# Altium PCB 探听器.PcbDoc
Units mil, origin at the board's own origin, x right, y up, seen from the top; angles counter-clockwise.
Board outline 5118.11 x 1968.5 mil, 2 copper layers (Top Layer, Bottom Layer); 17 components, 11 nets, 46 pads, 0 vias.
Unrouted connection lines stored in the file: 9.
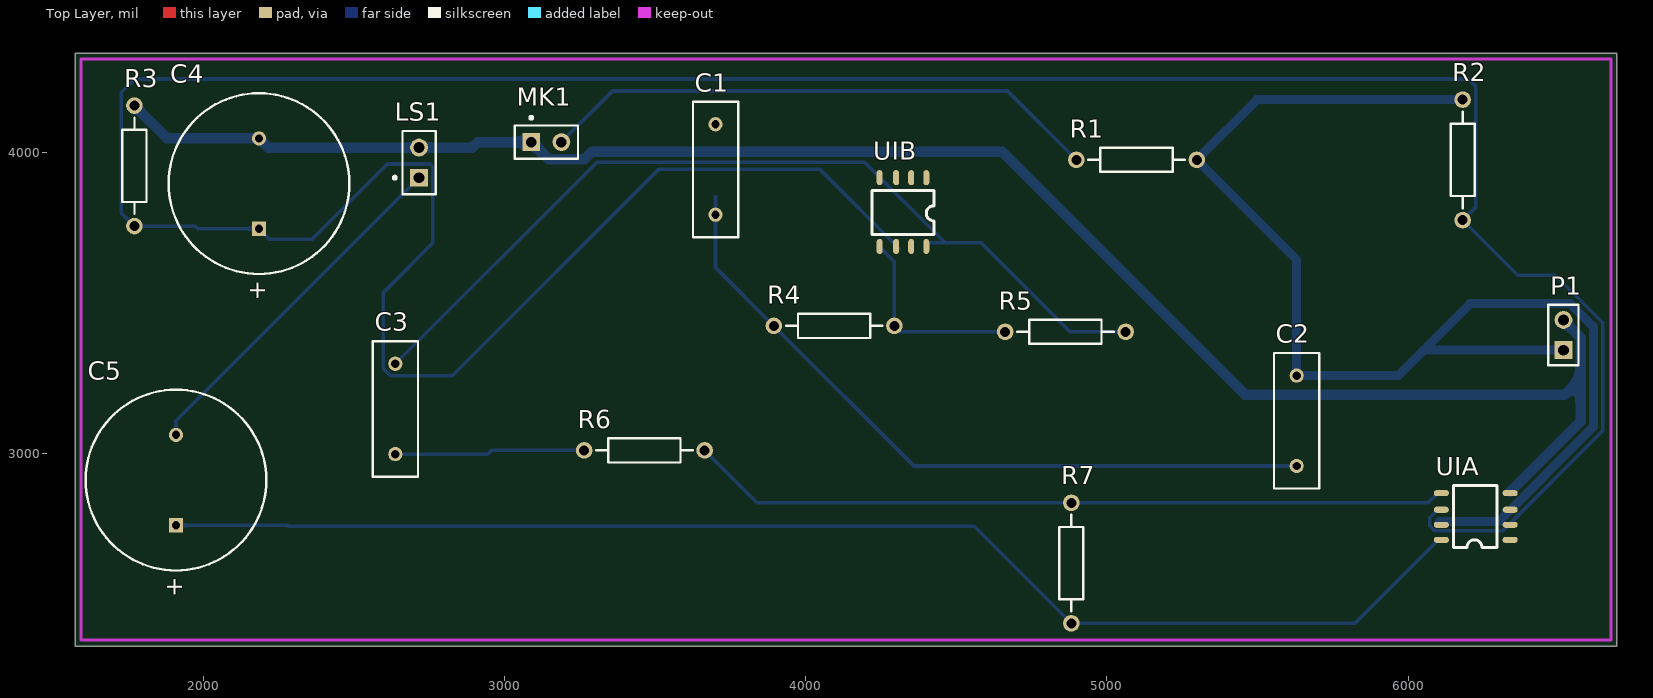
[diagram p0: Top Layer view]
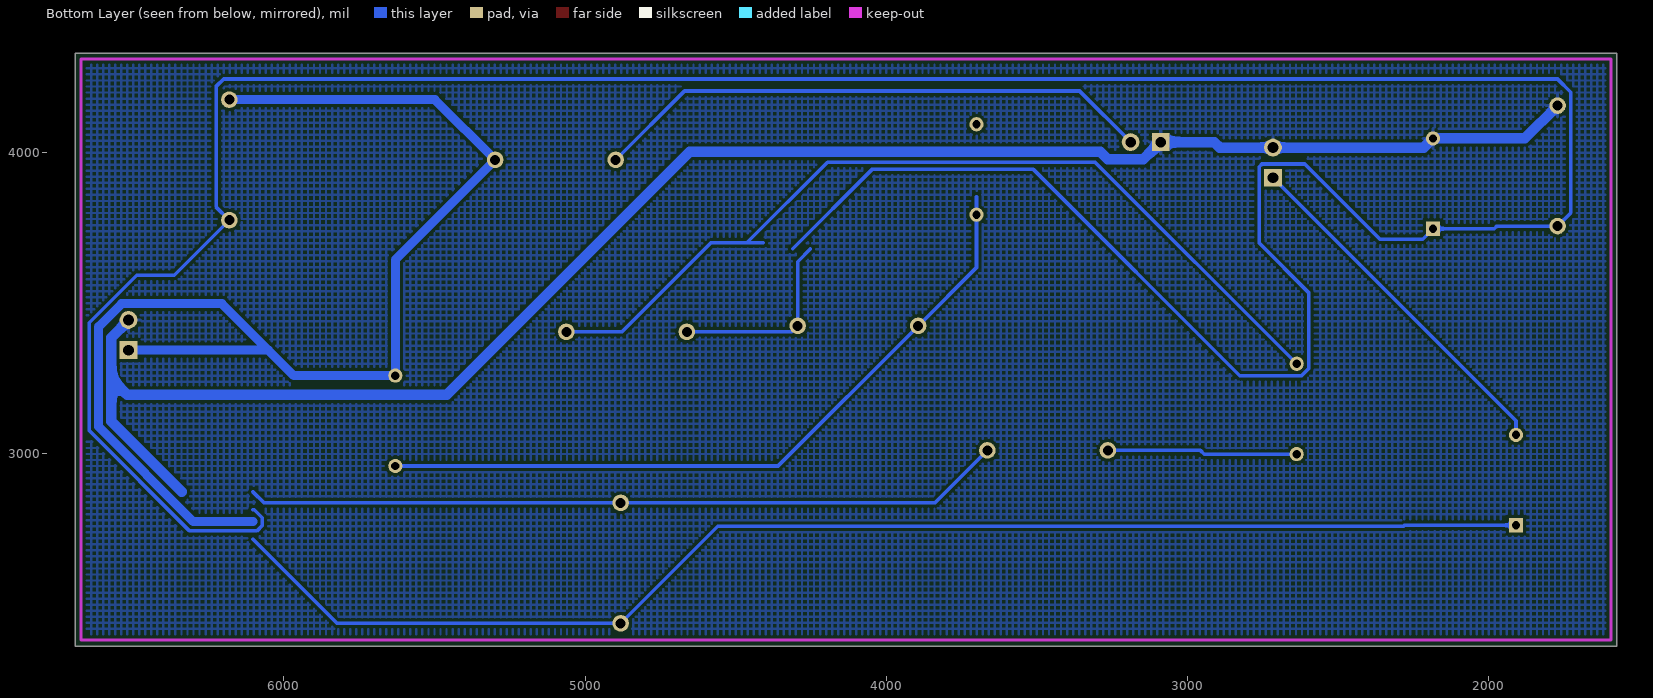
[diagram p1: Bottom Layer view, seen from below]

## Layer stack, top to bottom
Top Solder: solder mask 0.4, Solder Resist, Dk 3.5
Top Layer: signal copper 1.4
Dielectric 1: dielectric 12.6, FR-4, Dk 4.8
Bottom Layer: signal copper 1.4
Bottom Solder: solder mask 0.4, Solder Resist, Dk 3.5

## Board outline
1574.8,2362.2 6692.91,2362.2 6692.91,4330.71 1574.8,4330.71

## Design rules (kind name [scope] priority, off if disabled: settings)
Clearance [All] p1: gap=10 ignorepadtopadclearanceinfootprint=FALSE except(0: Arc-Hole Track-Hole SMDPad-Hole THPad-Hole Via-Hole Fill-Hole Poly-Hole Region-Hole Text-Hole)
PolygonConnect [All] p1: connectstyle=Relief reliefconductorwidth=10 reliefentries=4 polygonreliefangle="90 Angle" airgapwidth=10
RoutingLayers [All] p1: top layer_v5=FALSE bottom layer_v5=TRUE
RoutingVias [All] p1: holewidth=28 width=50 viastyle="Through Hole" minholewidth=28 minwidth=50 maxholewidth=28 maxwidth=50
SolderMaskExpansion [All] p1: expansion=4 istentingtop=FALSE
Width Width_2 [InNet('GND')] p1: maxlimit=35 minlimit=35 preferedwidth=35
Width Width_1 [InNet('VCC')] p2: maxlimit=30 minlimit=30 preferedwidth=30
Width [All] p3: maxlimit=12 minlimit=12 preferedwidth=12
29 further rules are at their usual default settings.

## Components (designator, comment, footprint, x,y, rotation, side; value= is the part's Value field where it differs from the comment)
C1 "104" RAD-0.3 3700.79,3944.49 r270 top value=100pF
C2 "103" RAD-0.3 5629.92,3110.24 r90 top value=100pF
C3 "103" RAD-0.3 2637.8,3149.61 r270 top value=100pF
C4 "Cap Pol1" RB7.6-15 2185.04,3897.64 r270 top value=10u
C5 "Cap Pol1" RB7.6-15 1909.45,2913.39 r270 top value=220u
LS1 "Speaker" PIN2 2716.54,3917.32 r90 top
MK1 "Mic2" PIN2 3088.98,4035.43 r0 top
P1 "Header 2" HDR1X2 6515.75,3344.88 r90 top
R1 "Res2" AXIAL-0.4 5098.43,3976.38 r0 top value=20K
R2 "Res2" AXIAL-0.4 6181.1,3976.38 r90 top value=20K
R3 "Res2" AXIAL-0.4 1771.65,3956.69 r90 top value=10K
R4 "Res2" AXIAL-0.4 4094.49,3425.2 r180 top value=1K
R5 "Res2" AXIAL-0.4 4862.2,3405.51 r180 top value=1M
R6 "1K" AXIAL-0.4 3464.57,3011.81 r0 top
R7 "Res2" AXIAL-0.4 4881.89,2637.8 r270 top value=1M
UIA "双运算放大器" LM358 6110.24,2714.96 r90 top
UIB "双运算放大器" LM358 4400.39,3688.98 r180 top

## Footprints (in the part's own frame and the unit in brackets; to place one, negate y for a bottom-side part, rotate by r counter-clockwise, add the part's x,y. Pads: shape width x height; smd on the part's side, far side on the other; paste and mask are expansions set on the pad)
AXIAL-0.4 [mm] "Axial Device, Thru-Hole; 2 Leads; 0.4 in Pin Spacing"
  round 1.4 hole 0.85: 1(-5.08,0) 2(5.08,0)
  silkscreen extent -4.06,-1.02 4.06,1.02
HDR1X2 [mm] "Connector; Header; 2 Position"
  rect 1.5x1.5 hole 0.9: 1(0,0)
  round 1.5 hole 0.9: 2(2.54,0)
  silkscreen extent -1.27,-1.27 3.81,1.27
LM358 [mm]
  oval 0.51x1.27 smd: 1(0,0) 2(1.27,0) 3(2.54,0) 4(3.937,0) 5(3.937,-5.8) 6(2.54,-5.8) 7(1.27,-5.8) 8(0,-5.8)
  silkscreen extent -0.64,-4.7 4.57,-1.02
PIN2 [mm] "Photosensitive Diode; 2 Leads"
  rect 1.5x1.5 hole 0.9: 1(0,0)
  round 1.5 hole 0.9: 2(2.54,0)
  silkscreen extent -1.4,-1.4 3.94,2.17
RAD-0.3 [mm] "Radial Cap, Thru-Hole; 2 Leads; 0.3 in Pin Spacing"
  round 1.2 hole 0.7: 1(-3.81,0) 2(3.81,0)
  silkscreen extent -5.71,-1.91 5.72,1.9
RB7.6-15 [mm] "Polarized Capacitor (Radial); 2 Leads"
  rect 1.2x1.2 hole 0.7: 1(3.81,0)
  round 1.2 hole 0.7: 2(-3.81,0)
  silkscreen extent -7.62,-7.62 7.62,7.62

## Part data
C1 C2 C3: library part Cap, "Capacitor", LatestRevisionDate=17-Jul-2002, LatestRevisionNote="Re-released for DXP Platform.", PackageDescription="Radial Cap, Thru-Hole; 2 Leads; 0.3 in Pin Spacing", PackageReference=RAD-0.3, Published=8-Jun-2000, Publisher="Altium Limited"
C4 C5: "Polarized Capacitor (Radial)", LatestRevisionDate=17-Jul-2002, LatestRevisionNote="Re-released for DXP Platform.", PackageDescription="Polarized Capacitor (Radial); 2 Leads", PackageReference=RB7.6-15, Published=8-Jun-2000, Publisher="Altium Limited"
LS1: "Loudspeaker", LatestRevisionDate=17-Jul-2002, LatestRevisionNote="Re-released for DXP Platform.", PackageReference=PIN2, Published=24-Mar-1999, Publisher="Altium Limited"
MK1: "Microphone", LatestRevisionDate=17-Jul-2002, LatestRevisionNote="Re-released for DXP Platform.", PackageReference=PIN2, Published=24-Mar-1999, Publisher="Altium Limited"
P1: "Header, 2-Pin", LatestRevisionDate=17-Jul-2002, LatestRevisionNote="Re-released for DXP Platform.", Publisher="Altium Limited"
R1 R2 R3 R4 R5 R7: "Resistor", LatestRevisionDate=17-Jul-2002, LatestRevisionNote="Re-released for DXP Platform.", PackageDescription="Axial Device, Thru-Hole; 2 Leads; 0.4 in Pin Spacing", PackageReference=AXIAL-0.4, Published=8-Jun-2000, Publisher="Altium Limited"
R6: library part Res2, "Resistor", LatestRevisionDate=17-Jul-2002, LatestRevisionNote="Re-released for DXP Platform.", PackageDescription="Axial Device, Thru-Hole; 2 Leads; 0.4 in Pin Spacing", PackageReference=AXIAL-0.4, Published=8-Jun-2000, Publisher="Altium Limited"
UIA UIB: library part 放大器

## Nets (pads, with @x,y where several pads share a name; then routed paths per layer and width w, separated by ;. In a path a pad name is that pad's centre, name@x,y a point inside that pad or via, vN(x,y) a via of type N, cw(c..) or ccw(c..) an arc to the next point about the centre after c; other vN are vias at no path point)
GND: C4.2 LS1.2 MK1.1 P1.2 R3.2 UIA.5 | length 5947.7
  Bottom Layer w35: R3.2 1880.71,4047.64 C4.2 2215.36,4017.32 LS1.2 2893,4017.32 2911.11,4035.43 MK1.1 3146.41,3978 3265,3978 3290,4003 4653,4003 5459,3197 6520,3197 6572.78,3249.78 ; 6338.58,2874.02 6572.78,3108.21 6572.78,3249.78 ; P1.2 6515.75,3442.93 6572.78,3385.91 6572.78,3249.78
NetC1_1: C1.1 MK1.2 R1.1 | length 1874.5
  Bottom Layer w12: MK1.2 3358.66,4205.12 3700.79,4205.12 4669.69,4205.12 R1.1
NetC1_2: C1.2 C2.1 R4.2 | length 2488.2
  Bottom Layer w12: C1.2 3700.79,3846.06 ; 3700.79,3853.54 3700.79,3618.9 R4.2 4359.45,2960.24 C2.1
NetC3_1: C3.1 R5.1 UIB.1 | length 2988.8
  Bottom Layer w12: C3.1 3307.19,3969 4195,3969 4463.21,3700.79 ; 4409.45,3700.79 4463.21,3700.79 ; R5.1 4877.63,3405.51 4582.35,3700.79 4463.21,3700.79
NetC3_2: C3.2 R6.1 | length 631.8
  Bottom Layer w12: C3.2 2945,2999.61 2957.21,3011.81 R6.1
NetC4_1: C4.1 R2.1 R3.1 UIA.3 UIB.3 | length 11171.2
  Bottom Layer w12: 4311.02,3681.1 4047.39,3944.74 3511.67,3944.74 2826.91,3259.98 2621.38,3259.98 2598.17,3283.19 2598.17,3536.39 2762.06,3700.28 2762.06,3953.48 2752.69,3962.85 2611.06,3962.85 2361.26,3713.05 2219.63,3713.05 C4.1 1982.05,3747.64 1973,3756.69 R3.1 1728,3800.35 1728,4201 1772,4245 6200,4245 6225,4220 6225,3820.27 R2.1 6364.16,3593.32 6488.26,3593.32 6646.28,3435.31 6646.28,3077.76 6313.1,2744.59 6089.52,2744.59 6071.36,2762.75 6071.36,2788.43 6097.89,2814.96 6102.36,2814.96
NetC5_1: C5.1 R7.2 UIA.1 | length 4443.2
  Bottom Layer w12: C5.1 2279.61,2763.39 2283,2760 4559.69,2760 R7.2 5823.62,2437.8 6102.36,2716.54
NetC5_2: C5.2 LS1.1 | length 1188.2
  Bottom Layer w12: C5.2 1909.45,3110.24 LS1.1
NetR4_1: R4.1 R5.2 UIB.4 | length 649.4
  Bottom Layer w12: 4251.97,3681.1 4294.49,3638.58 R4.1 4314.17,3405.51 R5.2
NetR6_2: R6.2 R7.1 UIA.4 | length 2524.9
  Bottom Layer w12: R6.2 3838.58,2837.8 R7.1 6066.14,2837.8 6102.36,2874.02
VCC: C2.2 P1.1 R1.2 R2.2 UIA.2 | length 4374.8
  Bottom Layer w30: 6102.36,2775.59 6300.26,2775.59 6615.28,3090.6 6615.28,3422.47 6538.33,3499.41 6206.05,3499.41 6051.52,3344.88 ; R2.2 5498.43,4176.38 R1.2 5629.92,3644.88 C2.2 5966.87,3260.24 6051.52,3344.88 ; P1.1 6051.52,3344.88
pads on no net: UIA.6 UIA.7 UIA.8 UIB.2 UIB.5 UIB.6 UIB.7 UIB.8

## Polygon pours and split planes (outlines as drawn)
GND on Bottom Layer "GND_L02_P002" (hatched 90Degree grid 20 track 8, pour order 2): 1594.49,4311.02 6673.23,4311.02 6673.23,2381.89 1594.49,2381.89

## Keep-outs
Keep-Out Layer:
  lines w10: 1594.49,2381.89 1594.49,4311.02 6673.23,4311.02 6673.23,2381.89 1594.49,2381.89

## Silkscreen, mask and mechanical layers (free items; w line width, h text height)
Mechanical 1:
  the board outline again, w10

## Text inside footprints (layer, text, board x,y; h text height)
C4: Top Overlay "+" at 2156.03,3577.48 h59.06 r270
C5: Top Overlay "+" at 1880.44,2593.23 h59.06 r270